# Altium PCB AQ_PCB.PcbDoc
Units mm, origin at the board's own origin, x right, y up, seen from the top; angles counter-clockwise.
Board outline 60.45 x 64.48 mm, 2 copper layers (Top Layer, Bottom Layer); 5 components, 7 nets, 61 pads, 0 vias.
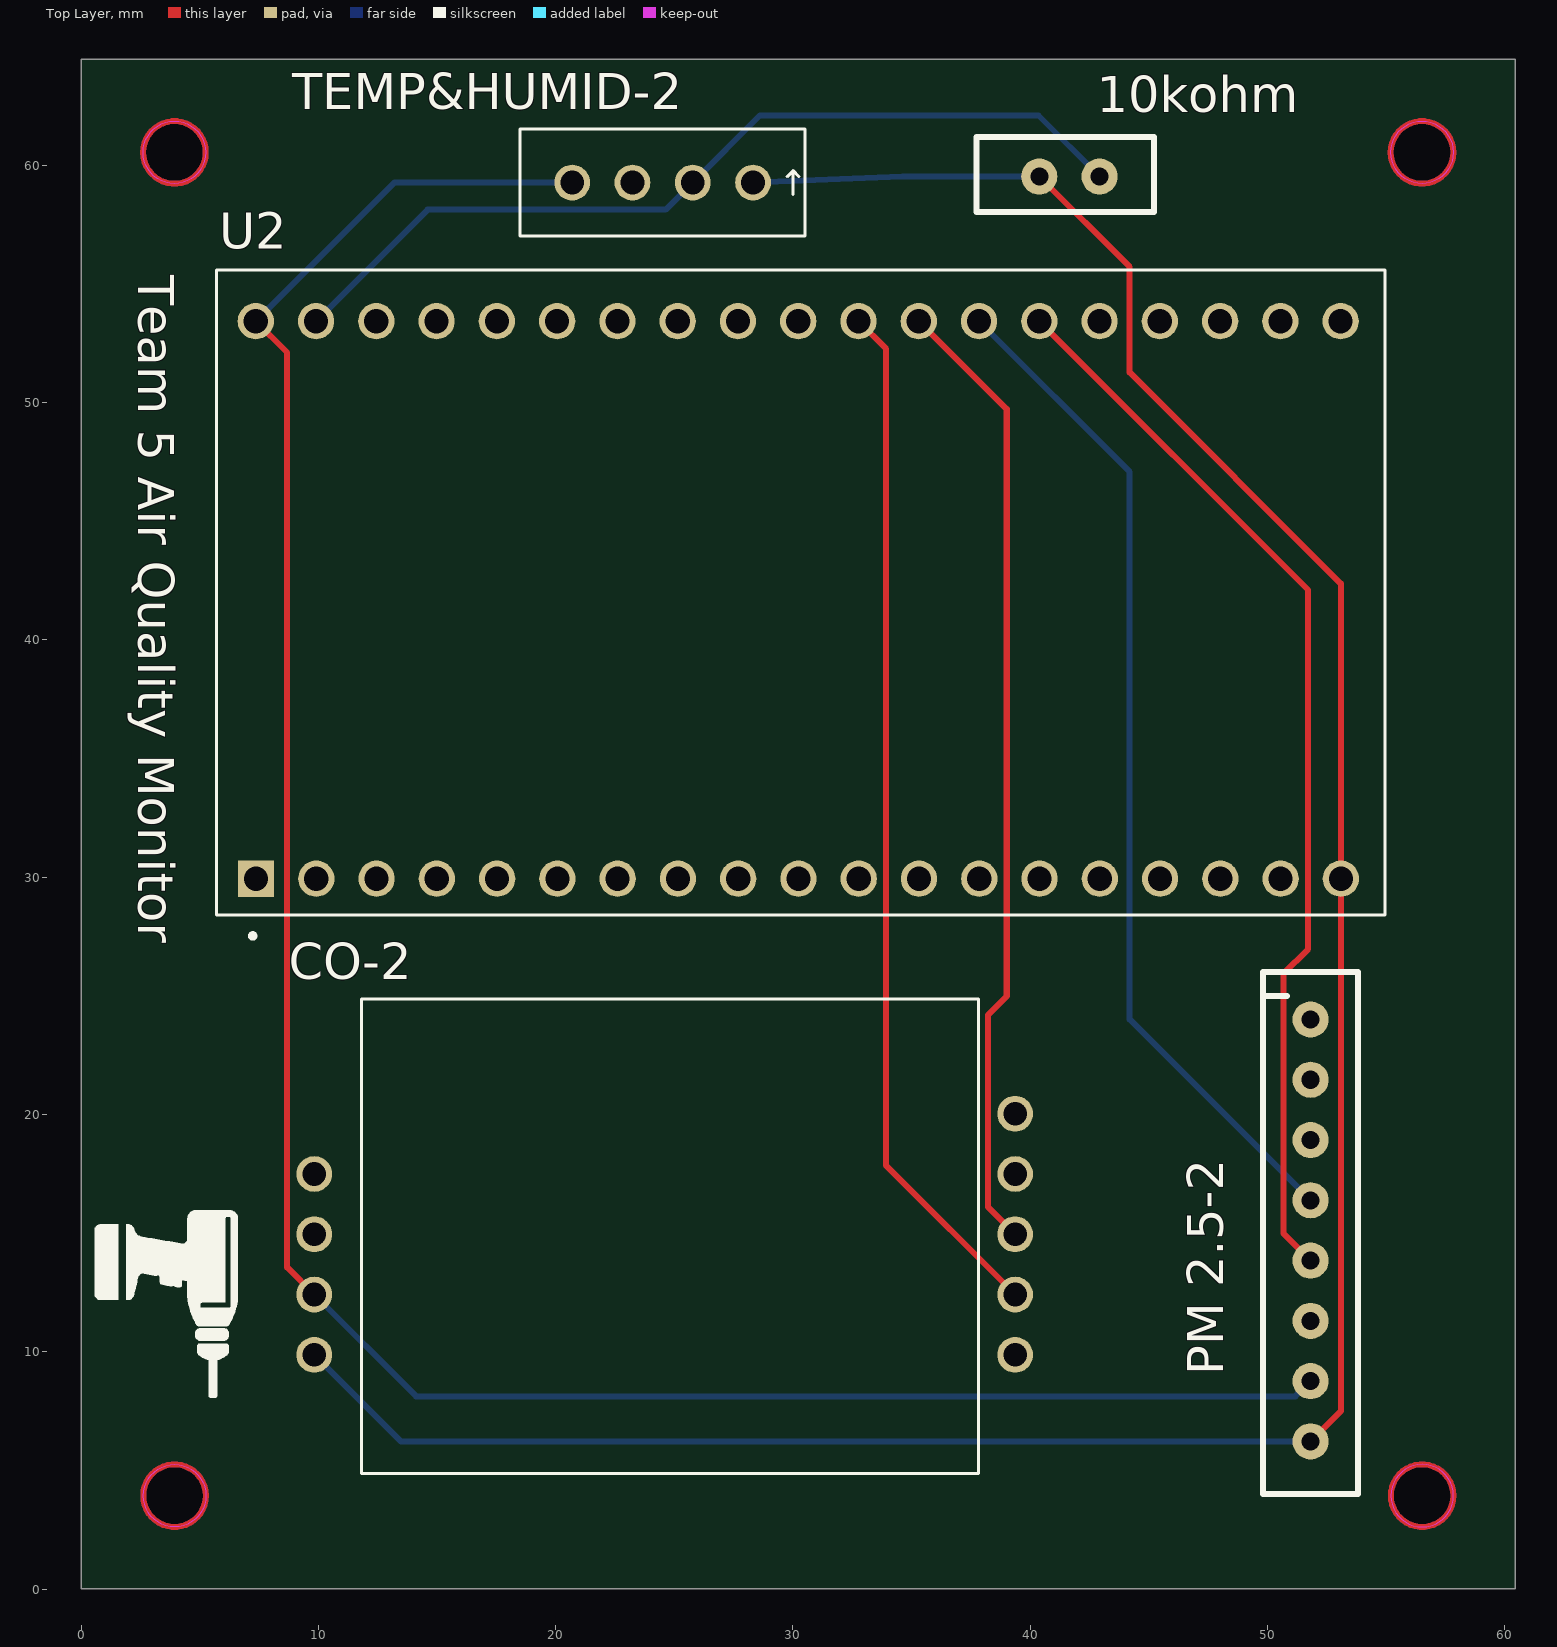
[diagram p0: Top Layer view]
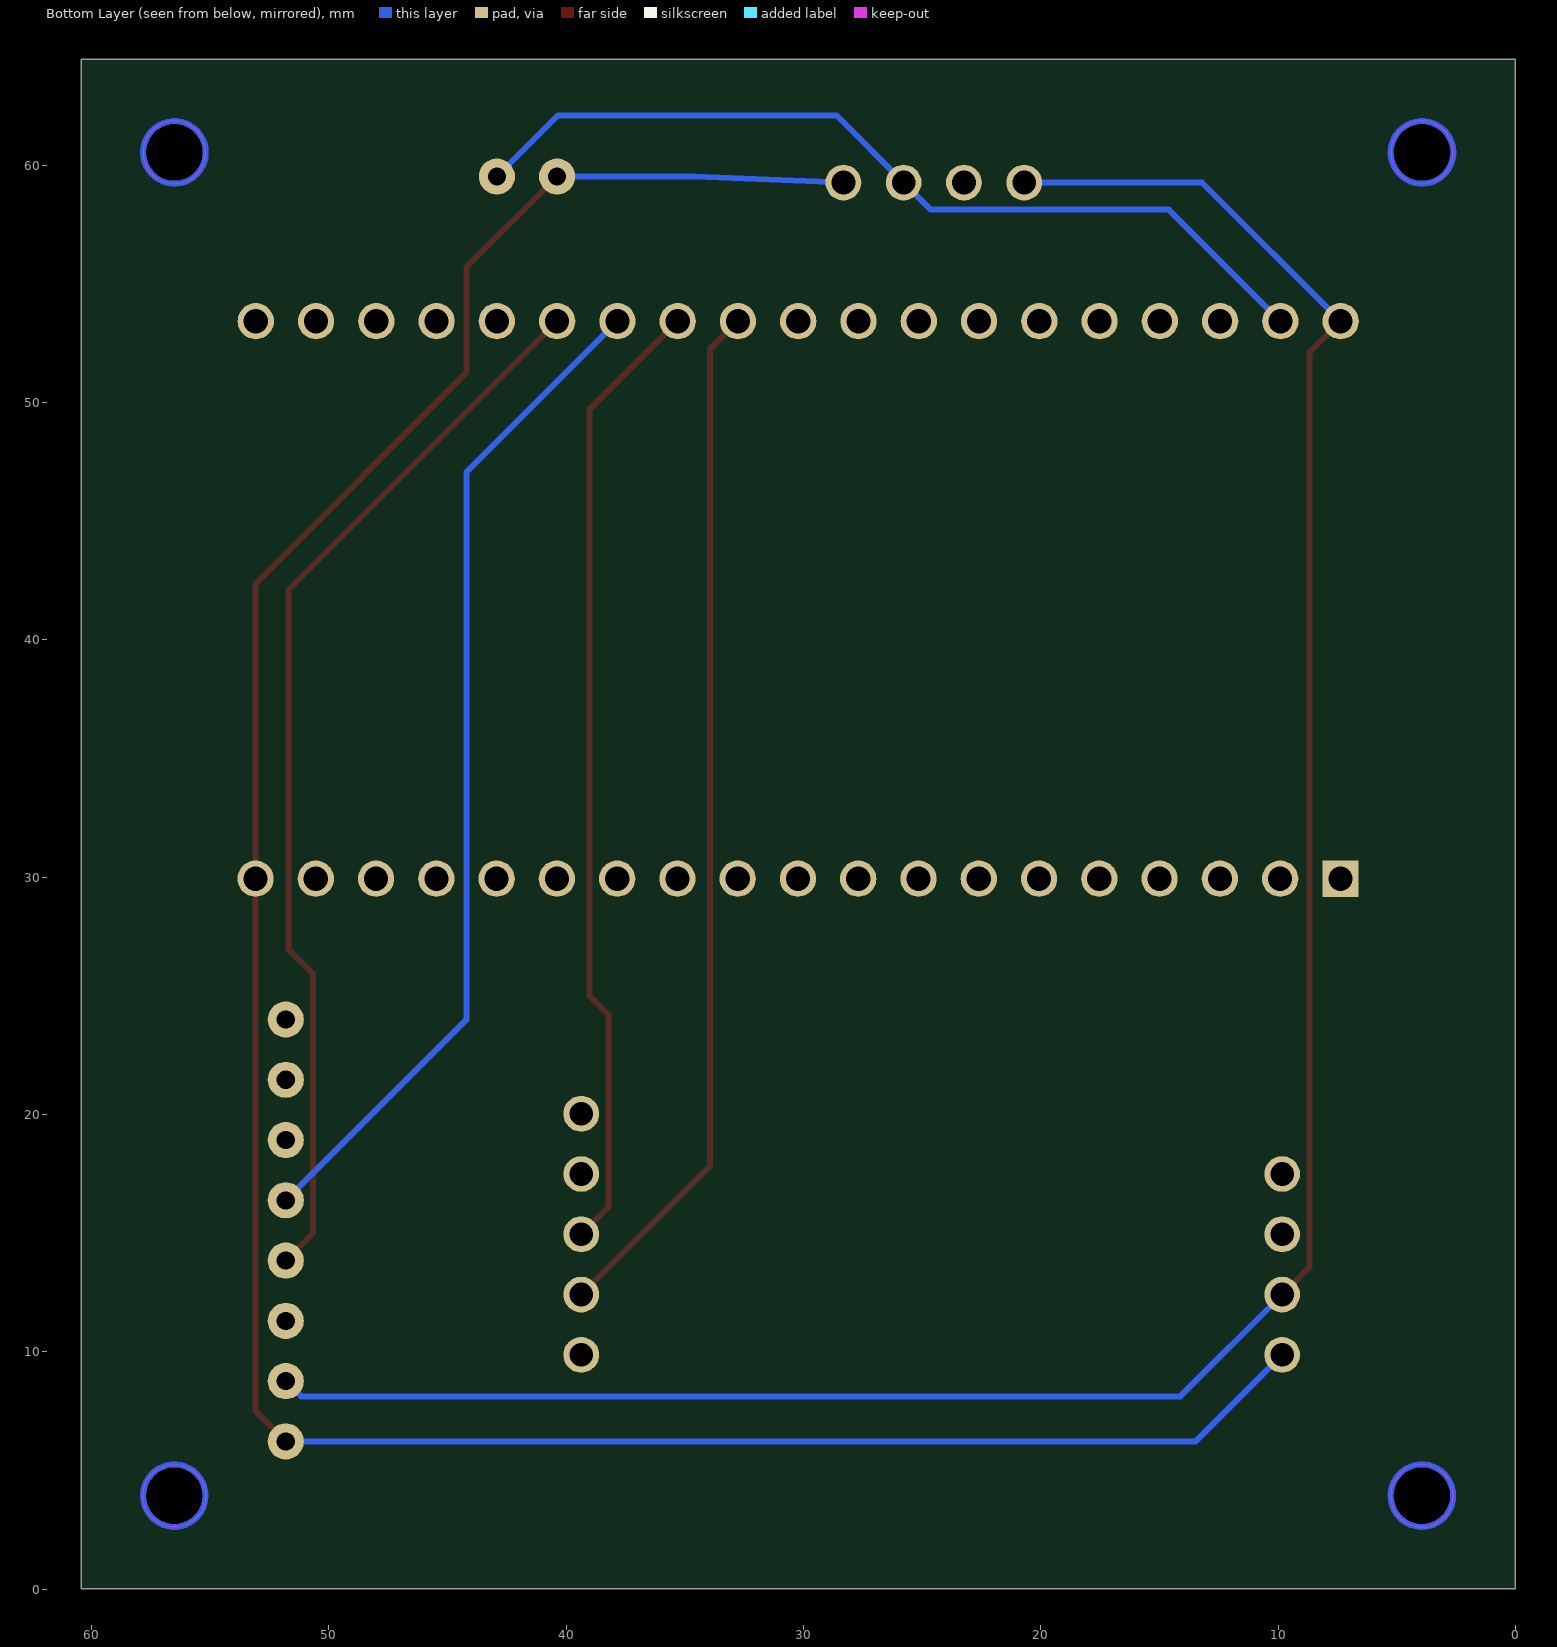
[diagram p1: Bottom Layer view, seen from below]

## Layer stack, top to bottom
Top Solder: solder mask 0.0102, Solder Resist, Dk 3.5
Top Layer: signal copper 0.0356
Dielectric 1: dielectric 0.32, FR-4, Dk 4.8
Bottom Layer: signal copper 0.0356
Bottom Solder: solder mask 0.0102, Solder Resist, Dk 3.5

## Board outline
-0.006,0.003 60.446,0.003 60.446,64.482 -0.006,64.482
cut-out: 55.197,3.937 ccw(c56.515,3.937) 56.515,2.619 ccw(c56.515,3.937) 57.833,3.937 ccw(c56.515,3.937) 56.515,5.255 ccw(c56.515,3.937)
cut-out: 3.937,2.619 cw(c3.937,3.937) 2.619,3.937 cw(c3.937,3.937) 3.937,5.255 cw(c3.937,3.937) 5.255,3.937 cw(c3.937,3.937)
cut-out: 55.197,3.937 ccw(c56.515,3.937) 56.515,2.619 ccw(c56.515,3.937) 57.833,3.937 ccw(c56.515,3.937) 56.515,5.255 ccw(c56.515,3.937)
cut-out: 3.937,2.619 cw(c3.937,3.937) 2.619,3.937 cw(c3.937,3.937) 3.937,5.255 cw(c3.937,3.937) 5.255,3.937 cw(c3.937,3.937)
cut-out: 56.509,59.227 cw(c56.509,60.545) 55.191,60.545 cw(c56.509,60.545) 56.509,61.863 cw(c56.509,60.545) 57.827,60.545 cw(c56.509,60.545)
cut-out: 3.931,59.227 cw(c3.931,60.545) 2.613,60.545 cw(c3.931,60.545) 3.931,61.863 cw(c3.931,60.545) 5.249,60.545 cw(c3.931,60.545)

## Design rules (kind name [scope] priority, off if disabled: settings)
Clearance [All] p1: gap=0.254 ignorepadtopadclearanceinfootprint=FALSE
PolygonConnect [All] p1: connectstyle=Relief reliefconductorwidth=0.254 reliefentries=4 polygonreliefangle="90 Angle" airgapwidth=0.254
RoutingVias [All] p1: holewidth=0.711 width=1.27 viastyle="Through Hole" minholewidth=0.711 minwidth=1.27 maxholewidth=0.711 maxwidth=1.27
SolderMaskExpansion [All] p1: expansion=0.102 istentingtop=FALSE
SupplyNets "Schematic Supply Nets_1" [InNet('GND')] p1: voltage=0.000
SupplyNets "Schematic Supply Nets" [InNet('+5')] p2: voltage=0.000
Width [All] p1: maxlimit=0.254 minlimit=0.254 preferedwidth=0.254
30 further rules are at their usual default settings.

## Components (designator, comment, footprint, x,y, rotation, side; value= is the part's Value field where it differs from the comment)
10kohm "Resistor" Resistor 42.804,59.298 r180 top
CO-2 "MH-Z19B" MH-Z19B-FOOT 9.824,9.872 r0 top
"PM 2.5-2" "G5 Switch Board" PM2.5 51.816,24.003 r0 top
TEMP&HUMID-2 "DHT11" SENSOR-DHT11 24.505,59.275 r180 top
U2 "ESP32-DEVKITC-32U" MODULE_ESP32-DEVKITC-32U 30.22,42.638 r90 top

## Footprints (in the part's own frame and the unit in brackets; to place one, negate y for a bottom-side part, rotate by r counter-clockwise, add the part's x,y. Pads: shape width x height; smd on the part's side, far side on the other; paste and mask are expansions set on the pad)
MH-Z19B-FOOT [mm]
  round 1.508 hole 1: GND(0,2.54) RX(29.54,2.54) TX(29.54,5.08) VIN(0,0) X@1(0,5.08) X@2(0,7.62) X@3(29.54,0) X@4(29.54,7.62) XQ5(29.54,10.16)
  silkscreen extent 2,-5 28,15, body extent -1.8,-4.83 30.76,14.87, height 8.8
MODULE_ESP32-DEVKITC-32U [mm]
  rect 1.53x1.53 / inner round 1.53 / far side rect 1.53x1.53 hole 1.02: 1(-12.7,22.85)
  round 1.53 hole 1.02: 2(-12.7,20.31) 3(-12.7,17.77) 4(-12.7,15.23) 5(-12.7,12.69) 6(-12.7,10.15) 7(-12.7,7.61) 8(-12.7,5.07) 9(-12.7,2.53) 10(-12.7,-0.01) 11(-12.7,-2.55) 12(-12.7,-5.09) 13(-12.7,-7.63) 14(-12.7,-10.17) 15(-12.7,-12.71) 16(-12.7,-15.25) 17(-12.7,-17.79) 18(-12.7,-20.33) 19(-12.7,-22.87) 20(10.795,-22.86) 21(10.795,-20.32) 22(10.795,-17.78) 23(10.795,-15.24) 24(10.795,-12.7) 25(10.795,-10.16) 26(10.795,-7.62) 27(10.795,-5.08) 28(10.795,-2.54) 29(10.795,0) 30(10.795,2.54) 31(10.795,5.08) 32(10.795,7.62) 33(10.795,10.16) 34(10.795,12.7) 35(10.795,15.24) 36(10.795,17.78) 37(10.795,20.32) 38(10.795,22.86)
  silkscreen extent -15.21,-24.73 12.95,24.51, body extent -14.82,-24.49 13.08,24.26, height 7.85
PM2.5 [mil]
  round 60 hole 30: 1(0,0) 2(0,-100) 3(0,-200) 4(0,-300) 5(0,-400) 6(0,-500) 7(0,-600) 8(0,-700)
  silkscreen extent -79,-787 79,79
Resistor [mil]
  round 60 hole 30: 1(-4.57,-9.12) 2(95.43,-9.12)
  silkscreen extent -95,-75 200,50
SENSOR-DHT11 [mm]
  round 1.508 hole 1: P$1(-3.81,0) P$2(-1.27,0) P$3(1.27,0) P$4(3.81,0)
  silkscreen extent -6,-2.25 6,2.25

## Part data
CO-2: "Intelligent Infrared CO2 Module", Package=Package, Availability="Not in stock", Check_prices=https://www.snapeda.com/parts/MH-Z19B/Winsen/view-part/?ref=eda, MF=Winsen, MP=MH-Z19B, Price=None, SnapEDA_Link=https://www.snapeda.com/parts/MH-Z19B/Winsen/view-part/?ref=snap
TEMP&HUMID-2: "Humidity, Temperature Digital Â±5% RH Through Hole", Package=None, Check_prices=https://www.snapeda.com/parts/DHT11/Ersa/view-part/?ref=eda, MF="UNIVERSAL-SOLDER Electronics Ltd", MP=DHT11, SnapEDA_Link=https://www.snapeda.com/parts/DHT11/Ersa/view-part/?ref=snap
U2: "ESP32-WROOM-32UE series Transceiver; 802.11 b/g/n (Wi-Fi, WiFi, WLAN), Bluetooth® Smart Ready 4.x Dual Mode Evaluation Board", Package="CUSTOM-38 ESPRESSIF", Check_prices=https://www.snapeda.com/parts/ESP32-DEVKITC-32U/Espressif+Systems/view-part/?ref=eda, MF="Espressif Systems", MP=ESP32-DEVKITC-32U, SnapEDA_Link=https://www.snapeda.com/parts/ESP32-DEVKITC-32U/Espressif+Systems/view-part/?ref=snap

## Nets (pads, with @x,y where several pads share a name; then routed paths per layer and width w, separated by ;. In a path a pad name is that pad's centre, name@x,y a point inside that pad or via, vN(x,y) a via of type N, cw(c..) or ccw(c..) an arc to the next point about the centre after c; other vN are vias at no path point)
+5: 10kohm.2 "PM 2.5-2.8" CO-2.VIN TEMP&HUMID-2.P$1 U2.19 | length 114.7
  Top Layer w0.254: 10kohm.2 44.19,55.719 44.19,51.274 53.09,42.374 U2.19 53.09,7.497 51.816,6.223
  Bottom Layer w0.254: CO-2.VIN 13.474,6.223 51.816,6.223 ; TEMP&HUMID-2.P$1 34.615,59.529 10kohm.2
DHT11: 10kohm.1 TEMP&HUMID-2.P$2 U2.37 | length 37.7
  Bottom Layer w0.254: U2.37 14.599,58.132 24.632,58.132 TEMP&HUMID-2.P$2 28.603,62.103 40.347,62.103 10kohm.1
GND: "PM 2.5-2.7" CO-2.GND TEMP&HUMID-2.P$4 U2.38 | length 101.8
  Top Layer w0.254: U2.38 8.681,52.112 8.681,13.555 CO-2.GND
  Bottom Layer w0.254: U2.38 13.202,59.275 TEMP&HUMID-2.P$4 ; CO-2.GND 14.117,8.12 51.173,8.12 51.816,8.763
PICO_CO2: CO-2.RX U2.28 | length 43.8
  Top Layer w0.254: U2.28 33.929,52.265 33.929,17.848 CO-2.RX
PICO_PM: "PM 2.5-2.5" U2.25 | length 45.2
  Top Layer w0.254: U2.25 51.709,42.105 51.709,26.966 50.667,25.925 50.667,14.992 51.816,13.843
POCI_CO2: CO-2.TX U2.27 | length 40.8
  Top Layer w0.254: U2.27 39.009,49.725 39.009,24.985 38.221,24.198 38.221,16.095 CO-2.TX
POCI_PM: "PM 2.5-2.4" U2.26 | length 42.8
  Bottom Layer w0.254: U2.26 44.19,47.083 44.19,24.009 51.816,16.383
pads on no net: "PM 2.5-2.1" "PM 2.5-2.2" "PM 2.5-2.3" "PM 2.5-2.6" CO-2.X@1 CO-2.X@2 CO-2.X@3 CO-2.X@4 CO-2.XQ5 TEMP&HUMID-2.P$3 U2.1 U2.2 U2.3 U2.4 U2.5 U2.6 U2.7 U2.8 U2.9 U2.10 U2.11 U2.12 U2.13 U2.14 U2.15 U2.16 U2.17 U2.18 U2.20 U2.21 U2.22 U2.23 U2.24 U2.29 U2.30 U2.31 U2.32 U2.33 U2.34 U2.35 U2.36

## Other copper
Multi-Layer:
  circle w0.254: c56.515,3.937 r1.318
  circle w0.254: c3.931,60.545 r1.318
  circle w0.254: c3.937,3.937 r1.318
  circle w0.254: c56.509,60.545 r1.318

## Silkscreen, mask and mechanical layers (free items; w line width, h text height)
Top Overlay:
  drawing of 4 lines, arcs and shapes, not listed
  text "Team 5 Air Quality Monitor" at 2.413,55.372 h1.52 r270